# Altium PCB esp32.PcbDoc
Units mm, origin at the board's own origin, x right, y up, seen from the top; angles counter-clockwise.
Board outline 47.1 x 68.1 mm, 2 copper layers (Top Layer, Bottom Layer); 30 components, 48 nets, 113 pads, 14 vias.
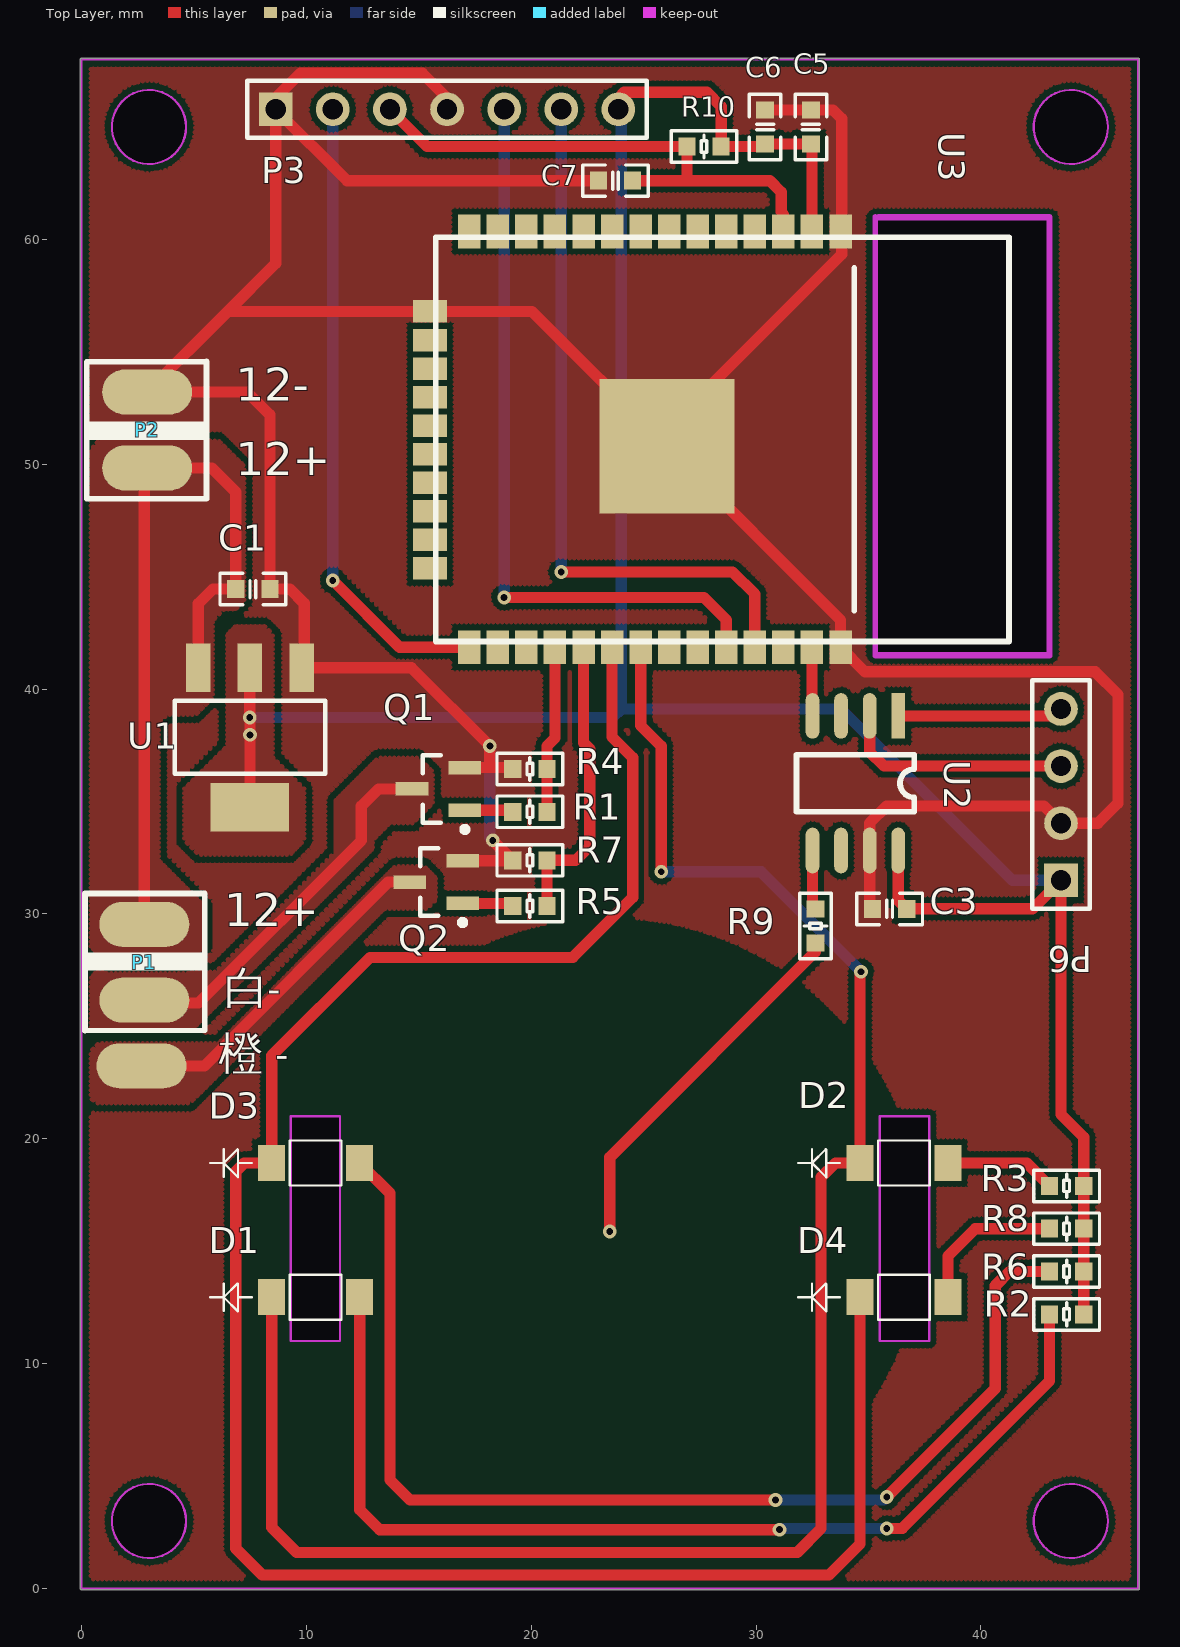
[diagram p0: Top Layer view]
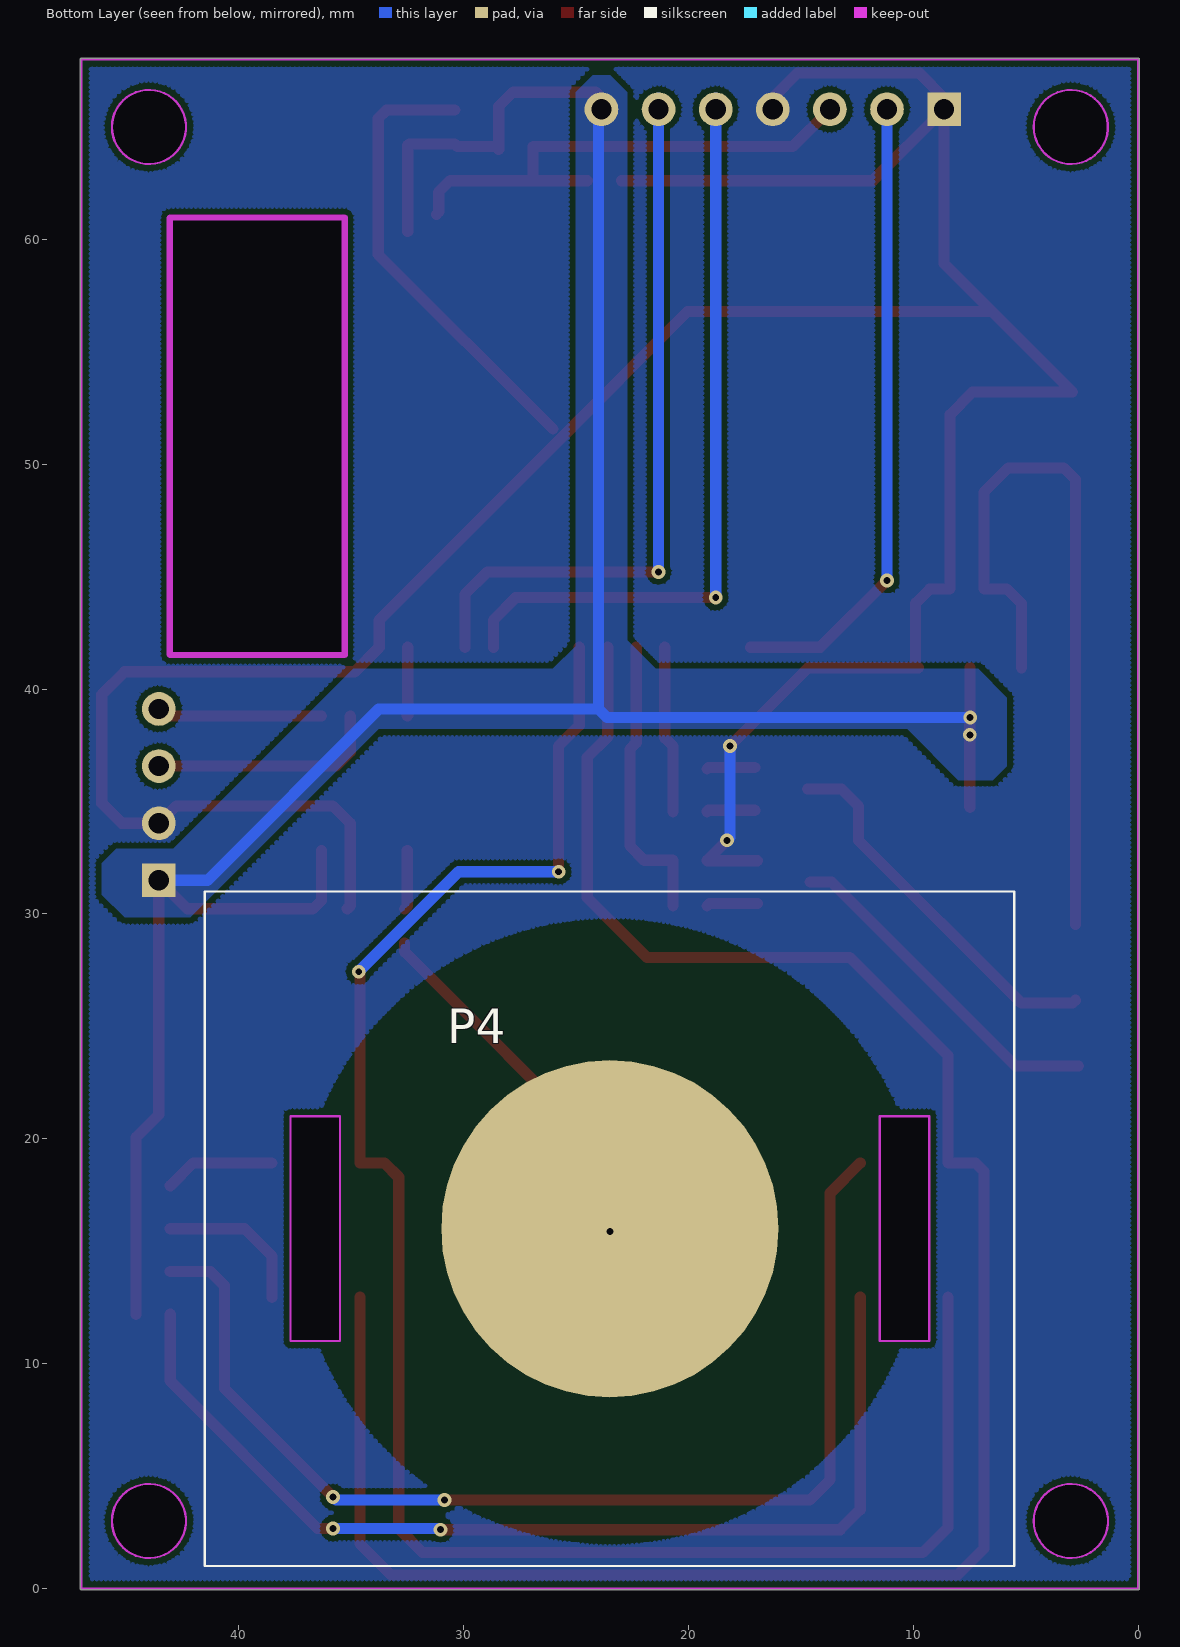
[diagram p1: Bottom Layer view, seen from below]

## Layer stack, top to bottom
Top Solder: solder mask 0.0102, Solder Resist, Dk 3.5
Top Layer: signal copper 0.0356
Dielectric 1: dielectric 0.32, FR-4, Dk 4.8
Bottom Layer: signal copper 0.0356
Bottom Solder: solder mask 0.0102, Solder Resist, Dk 3.5

## Board outline
-0.05,31.5 -0.05,62.5 cw(c0,62.5) -0.05,62.501 -0.05,62.5 ccw(c0,62.5) -0.05,62.499 -0.05,62.5 -0.05,68 cw(c0,68) 0,68.05 cw(c0,68) 0,68.05 47,68.05 cw(c47,68) 47.05,68 47.05,0 cw(c47,0) 47,-0.05 0,-0.05 cw(c0,0) -0.05,0 -0.05,68 ccw(c0,68)
cut-out: 35.179,41.529 ccw(c35.306,41.529) 35.306,41.402 43.053,41.402 ccw(c43.053,41.529) 43.18,41.529 43.18,60.96 ccw(c43.053,60.96) 43.053,61.087 35.433,61.087 ccw(c35.433,60.96) 35.369,61.07 ccw(c35.306,60.96) 35.179,60.96
cut-out: 3,63.35 cw(c3,65) 1.35,65 cw(c3,65) 3,66.65 cw(c3,65) 4.65,65 cw(c3,65)
cut-out: 42.35,65 ccw(c44,65) 44,63.35 ccw(c44,65) 45.65,65 ccw(c44,65) 44,66.65 ccw(c44,65)
cut-out: 1.349,3 ccw(c2.999,3) 2.999,1.35 ccw(c2.999,3) 4.649,3 ccw(c2.999,3) 2.999,4.65 ccw(c2.999,3)
cut-out: 42.35,3 ccw(c44,3) 44,1.35 ccw(c44,3) 45.65,3 ccw(c44,3) 44,4.65 ccw(c44,3)
cut-out: 9.3,11.002 9.3,21.002 11.5,21.002 11.5,11.002
cut-out: 35.5,11.002 35.5,21.002 37.7,21.002 37.7,11.002

## Design rules (kind name [scope] priority, off if disabled: settings)
Clearance [All] p1: gap=0.254 ignorepadtopadclearanceinfootprint=TRUE except(0: SMDPad-Hole THPad-Hole Via-Hole Fill-Hole Poly-Hole Region-Hole Text-Hole)
PolygonConnect [All] p1: connectstyle=Direct reliefconductorwidth=0.254 reliefentries=4 polygonreliefangle="90 Angle" airgapwidth=0.254
RoutingVias [All] p1: holewidth=0.711 width=1.27 viastyle="Through Hole" minholewidth=0.711 minwidth=1.27 maxholewidth=0.711 maxwidth=1.27
ShortCircuit [All] p1: allowed=TRUE
SolderMaskExpansion [All] p1: expansion=0.102
Width [All] p1: maxlimit=1 minlimit=0.5 preferedwidth=0.5
29 further rules are at their usual default settings.

## Components (designator, comment, footprint, x,y, rotation, side; value= is the part's Value field where it differs from the comment)
C1 "1uF/0603/16v/10%" C0603 7.62,44.45 r180 top
C3 "100nF" C0603 35.941,30.226 r0 top
C5 "10uF" C0603 32.436,65.001 r270 top
C6 "0.1uF" C0603 30.404,64.999 r90 top
C7 "0.1uF" C0603 23.749,62.611 r0 top
D1 "Blue" 1206反贴LED 10.414,12.954 r180 top
D2 "Blue" 1206反贴LED 36.576,18.923 r180 top
D3 "white" 1206反贴LED 10.414,18.923 r180 top
D4 "white" 1206反贴LED 36.576,12.954 r180 top
P1 "NC" PAD_2 2.692,29.54 r0 top
P2 "NC" PAD_2 3.023,49.835 r180 top
P3 "Header 7" HDR1X7 8.636,65.786 r0 top
P4 "NC" TOUCH_PAD 23.5,16 r180 bottom
P6 "Header 4" HDR1X4 43.561,31.496 r90 top
Q1 "AO3400/SOT-23" SOT_23_N-MOS 15.875,35.56 r90 top
Q2 "AO3400/SOT-23" SOT_23_N-MOS 15.773,31.42 r90 top
R1 "Resistor 1K/0603/5%" R0603 19.939,34.544 r0 top
R2 "Resistor 680R/0603/5%" R0603 43.815,12.192 r180 top value=1K
R3 "Resistor 680R/0603/5%" R0603 43.815,17.907 r180 top value=1K
R4 "Resistor 4.7K/0603/5%" R0603 19.939,36.449 r0 top
R5 "Resistor 1K/0603/5%" R0603 19.939,30.353 r0 top
R6 "Resistor 680R/0603/5%" R0603 43.815,14.097 r180 top value=1K
R7 "Resistor 4.7K/0603/5%" R0603 19.939,32.385 r0 top
R8 "Resistor 680R/0603/5%" R0603 43.815,16.002 r180 top value=1K
R9 "Resistor 1K/0603/5%" R0603 32.639,29.464 r90 top
R10 "10K" R0603 27.686,64.135 r0 top
U1 "AMS1117-3.3" SOT-223_L6.5-W3.5-P2.30-LS7.0-BR 7.493,37.846 r90 top
U2 "bs83b04" "SOP8 - duplicate - duplicate" 34.417,35.814 r270 top
U3 "ESP-WROOM-32" ESP-WROOM-32 24.625,51.105 r270 top locked
"橙 -" "PAD" PAD 2.667,23.241 r0 top (schematic designator P5)

## Footprints (in the part's own frame and the unit in brackets; to place one, negate y for a bottom-side part, rotate by r counter-clockwise, add the part's x,y. Pads: shape width x height; smd on the part's side, far side on the other; paste and mask are expansions set on the pad)
1206反贴LED [mm]
  rect 1.2x1.6 smd: A(-1.956,0) K(1.956,0)
  silkscreen extent -1.15,-1 4.7,1
C0603 [mm]
  rect 0.76x0.8 smd: 1(-0.76,0) 2(0.76,0)
  silkscreen extent -1.46,-0.7 1.46,0.7
ESP-WROOM-32 [mil]
  rect 59.1x39.4 smd: 1(-364,359.5) 2(-364,309.5) 3(-364,259.5) 4(-364,209.5) 5(-364,159.5) 6(-364,109.5) 7(-364,59.5) 8(-364,9.5) 9(-364,-40.5) 10(-364,-90.5) 11(-364,-140.5) 12(-364,-190.5) 13(-364,-240.5) 14(-364,-290.5) 25(364,-290.5) 26(364,-240.5) 27(364,-190.5) 28(364,-140.5) 29(364,-90.5) 30(364,-40.5) 31(364,9.5) 32(364,59.5) 33(364,109.5) 34(364,159.5) 35(364,209.5) 36(364,259.5) 37(364,309.5) 38(364,359.5)
  rect 39.4x59.1 smd: 15(-224,-359.5) 16(-174,-359.5) 17(-124,-359.5) 18(-74,-359.5) 19(-24,-359.5) 20(26,-359.5) 21(76,-359.5) 22(126,-359.5) 23(176,-359.5) 24(226,-359.5)
  rect 236.2x236.2 smd: 39(12,55.5)
  silkscreen extent -354,-350 354,655
HDR1X4 [mm] "Connector; Header; 4 Position"
  rect 1.5x1.5 hole 0.9: 1(0,0)
  round 1.5 hole 0.9: 2(2.54,0) 3(5.08,0) 4(7.62,0)
  silkscreen extent -1.27,-1.27 8.89,1.27
HDR1X7 [mm] "Connector; Header; 7 Position"
  rect 1.5x1.5 hole 0.9: 1(0,0)
  round 1.5 hole 0.9: 2(2.54,0) 3(5.08,0) 4(7.62,0) 5(10.16,0) 6(12.7,0) 7(15.24,0)
  silkscreen extent -1.27,-1.27 16.51,1.27
PAD [mm]
  oval 4x2 smd: 1(0,0)
PAD_2 [mm]
  oval 4x2 smd: 1(0.102,0) 2(0.102,-3.378)
  silkscreen extent -2.59,-4.74 2.79,1.37
R0603 [mm]
  rect 0.76x0.8 smd: 1(-0.76,0) 2(0.76,0)
  silkscreen extent -1.46,-0.7 1.46,0.7
"SOP8 - duplicate - duplicate" [mil]
  rect 80x24 smd: 1(-117.87,75)
  oval 80x24 smd: 2(-117.87,25) 3(-117.87,-25) 4(-117.87,-75) 5(117.87,-75) 6(117.87,-25) 7(117.87,25) 8(117.87,75)
  silkscreen extent -50,-103 50,103, body extent -118,-96 118,96, height 67
SOT-223_L6.5-W3.5-P2.30-LS7.0-BR [mil]
  rect 85x43 smd: 1(122,-90.5) 2(122,0.5) 3(122,90.5)
  rect 85x138 smd: 4(-122,0.5)
  silkscreen extent -64,-132 64,132
SOT_23_N-MOS [mm]
  rect 0.6x1.45 smd: 1(0,1.175) 2(-0.95,-1.175) 3(0.95,-1.175)
  silkscreen extent -1.92,-1.3 1.5,0.7, body extent -1.5,-0.7 1.5,0.7, height 1.1
TOUCH_PAD [mm]
  round 15 smd: 1(0,0)
  round 15 on Bottom Solder: ""(0,0)

## Part data
C1 C5 C6 C7: library part C0603
C3: library part C0603, "100nF/0603/16v/10%"
D1 D2 D3 D4: library part LED
P1 P2: library part Light
P3: "Header, 7-Pin", LatestRevisionDate=17-Jul-2002, LatestRevisionNote="Re-released for DXP Platform.", Publisher="Altium Limited"
P4: library part TOUCH_PAD
P6: "Header, 4-Pin", LatestRevisionDate=17-Jul-2002, LatestRevisionNote="Re-released for DXP Platform.", Publisher="Altium Limited"
Q1 Q2: library part MOSFET-N, LatestRevisionDate=17-Jul-2002, LatestRevisionNote="Re-released for DXP Platform.", PackageDescription="TO, Flat Index; 3 In-Line, Axial Leads; Body Dia. 4.6mm; Lead Dia. 0.5 mm (max)", PackageReference=E3, PackageVersion=1995/1996, Published=8-Jun-2000, Publisher="Altium Limited"
R1 R4 R5 R7 R9 R10: library part RES
R2 R3 R6 R8: library part Res2, "Resistor 2.2K/0603/5%", LatestRevisionDate=17-Jul-2002, LatestRevisionNote="Re-released for DXP Platform.", PackageDescription="Axial Device, Thru-Hole; 2 Leads; 0.4 in Pin Spacing", PackageReference=AXIAL-0.4, Published=8-Jun-2000, Publisher="Altium Limited"
U1: BOM_LCSC Assembly=Yes, BOM_Manufacturer=SK, BOM_Manufacturer Part=AMS1117-3.3, BOM_Supplier=LCSC, BOM_Supplier Part=C165482, Contributor=LCSC, SMT Type=Extend, spicePre=U, spiceSymbolName=AMS1117-3.3_C165482
U2: library part ASC0130C
U3: BOM_Manufacturer=ESPRESSIF, BOM_Manufacturer Part=ESP-WROOM-32, BOM_Supplier=LCSC, BOM_Supplier Part=C95209, spicePre=U, spiceSymbolName=ESP-WROOM-32

## Via types
v1: diameter 0.61, hole 0.305, Top Layer to Bottom Layer, tented both sides, 14 vias

## Nets (pads, with @x,y where several pads share a name; then routed paths per layer and width w, separated by ;. In a path a pad name is that pad's centre, name@x,y a point inside that pad or via, vN(x,y) a via of type N, cw(c..) or ccw(c..) an arc to the next point about the centre after c; other vN are vias at no path point)
12V: C1.2 P1.1 P2.1 U1.3 | length 33.6
  Top Layer w0.5: P1.1 2.794,49.327 3.302,49.835 5.791,49.835 6.858,48.768 6.858,44.45 5.842,44.45 5.194,43.802 U1.3
CLK: U3.20
CMD: U3.19
GND: C1.1 C3.1 C5.1 C6.2 C7.1 P2.2 P3.1 P3.4 P6.2 Q1.3 Q2.3 R4.1 R7.1 U1.1 U2.7 U3.1 U3.15 U3.38 U3.39 | length 167.4
  Top Layer w0.5: P3.4@16.256,66.294 15.15,67.4 9.742,67.4 8.636,66.294 P3.1 ; Q2.3 19.164,32.37 R7.1 19.177,32.385 v1(18.288,33.274) ; Q1.3 18.161,36.51 ; R4.1 19.118,36.51 18.161,36.51 ; C7.1 11.811,62.611 P3.1 ; U3.39@26.035,51.562 33.807,59.334 33.807,65.38 33.426,65.761 C5.1 32.434,65.759 C6.2 ; C3.1 35.052,30.355 U2.7 35.052,34.036 35.814,34.798 42.799,34.798 P6.2 45.212,34.036 46.101,34.925 46.101,39.751 45.085,40.767 34.849,40.767 U3.38 33.757,43.078 U3.39 20.041,56.794 U3.15 6.502,56.794 ; 6.502,56.794 8.636,58.928 P3.1 ; 6.502,56.794 P2.2 7.366,53.213 8.38,52.199 C1.1 9.271,44.45 9.906,43.815 9.906,41.059 U1.1 14.681,40.945 v1(18.161,37.465) 18.161,36.51
  Bottom Layer w0.5: v1(18.161,37.465) 18.161,33.401 v1(18.288,33.274)
IO0: P3.2 U3.25 | length 28.3
  Top Layer w0.5: v1(11.176,44.831) 14.148,41.859 U3.25
  Bottom Layer w0.5: v1(11.176,44.831) P3.2
IO2: U3.24
IO4: U3.26
IO5: R5.2 R7.2 U3.29 | length 13.2
  Top Layer w0.5: R5.2 R7.2 21.971,32.385 22.606,33.02 22.606,37.338 22.327,37.617 U3.29
IO12: U3.14
IO13: U3.16
IO14: U3.13
IO15: U3.23
IO16: U3.27
IO17: R1.2 R4.2 U3.28 | length 7.5
  Top Layer w0.5: R1.2 R4.2 20.699,37.467 21.057,37.825 U3.28
IO18: D3.K D4.K U3.30 | length 93.6
  Top Layer w0.5: U3.30 23.597,37.871 24.511,36.957 24.511,30.734 21.844,28.067 12.827,28.067 8.458,23.698 D3.K 7.239,18.923 6.858,18.542 6.858,1.778 8.036,0.6 33.239,0.6 34.62,1.981 D4.K
IO19: D1.K D2.K U3.31 | length 82.8
  Top Layer w0.5: D1.K 8.458,2.718 9.572,1.604 31.83,1.604 32.893,2.667 32.893,18.288 33.528,18.923 D2.K 34.62,27.381 v1(34.671,27.432) ; U3.31 24.867,38.379 25.781,37.465 v1(25.781,31.877)
  Bottom Layer w0.5: v1(25.781,31.877) 30.226,31.877 v1(34.671,27.432)
IO21: U3.33
IO22: U3.36
IO23: U2.4 U3.37 | length 3.1
  Top Layer w0.5: U3.37 32.487,38.833 U2.4
IO25: U3.10
IO26: U3.11
IO27: U3.12
IO32: U3.8
IO33: U3.9
IO34: U3.6
IO35: U3.7
NE: C7.2 P3.3 R10.1 U3.3 | length 23.3
  Top Layer w0.5: P3.3 15.367,64.135 R10.1 26.926,62.736 27.051,62.611 ; C7.2 27.051,62.611 ; 31.217,61.112 31.115,61.214 31.115,62.103 30.607,62.611 27.051,62.611
NetD1_A: D1.A R2.2 | length 46.2
  Top Layer w0.5: D1.A 12.37,3.505 13.259,2.616 v1(31.039,2.616) ; v1(35.814,2.667) 36.499,2.667 43.055,9.223 R2.2
  Bottom Layer w0.5: v1(31.039,2.616) 31.09,2.667 v1(35.814,2.667)
NetD2_A: D2.A R3.2 | length 4.9
  Top Layer w0.5: D2.A 42.039,18.923 R3.2
NetD3_A: D3.A R6.2 | length 51.2
  Top Layer w0.5: D3.A 13.716,17.577 13.716,4.826 14.605,3.937 v1(30.861,3.937) ; v1(35.814,4.064) 40.64,8.89 40.64,13.462 41.275,14.097 R6.2
  Bottom Layer w0.5: v1(30.861,3.937) 35.687,3.937 v1(35.814,4.064)
NetD4_A: D4.A R8.2 | length 6.9
  Top Layer w0.5: D4.A 38.532,14.783 39.751,16.002 R8.2
NetP1_2: P1.2 Q1.1 | length 16.8
  Top Layer w0.5: P1.2 2.921,26.035 5.207,26.035 12.446,33.274 12.446,34.798 13.208,35.56 Q1.1
NetP4_1: P4.1 R9.1 | length 16.6
  Top Layer w0.5: v1(23.495,15.875) 23.495,19.177 32.639,28.321 R9.1
NetP5_1: "橙 -.1" Q2.1 | length 15.3
  Top Layer w0.5: 2.667,23.241 5.461,23.241 13.64,31.42 Q2.1
NetQ1_2: Q1.2 R1.1 | length 2.2
  Top Layer w0.5: Q1.2 19.113,34.61 R1.1
NetQ2_2: Q2.2 R5.1 | length 2.3
  Top Layer w0.5: Q2.2 19.062,30.47 R5.1
NetR9_2: R9.2 U2.5 | length 2.6
  Top Layer w0.5: U2.5 32.512,30.351 R9.2
RXD0: P3.5 U3.34 | length 33.7
  Top Layer w0.5: v1(18.796,44.069) 27.686,44.069 28.677,43.078 U3.34
  Bottom Layer w0.5: v1(18.796,44.069) P3.5 P3.5@18.796,66.294
SCK: P6.3 U2.2 | length 10.4
  Top Layer w0.5: U2.2 35.052,37.211 35.687,36.576 P6.3
SD0: U3.21
SD1: U3.22
SD2: U3.17
SD3: U3.18
SDK: P6.4 U2.1 | length 7.4
  Top Layer w0.5: U2.1 43.253,38.808 P6.4
SENSOR_VN: U3.5
SENSOR_VP: U3.4
TXD0: P3.6 U3.35 | length 32.5
  Top Layer w0.5: v1(21.336,45.212) 28.956,45.212 29.947,44.221 U3.35
  Bottom Layer w0.5: v1(21.336,45.212) P3.6 P3.6@21.336,66.294
VCC: C3.2 C5.2 C6.1 P3.7 P6.1 R2.1 R3.1 R6.1 R8.1 R10.2 U1.2 U1.4 U2.8 U3.2 | length 116.9
  Top Layer w0.5: U1.4 7.493,34.76 v1(7.493,37.963) 7.493,38.722 v1(7.48,38.735) U1.2 ; P3.7@23.876,66.294 24.13,66.548 27.813,66.548 28.448,65.913 R10.2@28.448,64.135 ; R10.2 R10.2@28.448,64.135 ; R10.2@28.453,64.01 28.448,64.01 R10.2@28.448,64.135 ; U3.2 32.487,64.19 C5.2 30.406,64.241 C6.1 30.3,64.135 R10.2@28.448,64.135 ; U2.8 36.322,30.605 C3.2 42.291,30.226 P6.1 43.561,21.082 44.577,20.066 44.577,12.194 R2.1
  Bottom Layer w0.5: v1(7.48,38.735) 23.622,38.735 24.003,39.116 ; P3.7@24.003,65.786 24.003,39.116 ; P6.1 41.402,31.496 33.782,39.116 24.003,39.116
pads on no net: P4. U2.3 U2.6 U3.32

## Polygon pours and split planes (outlines as drawn)
GND on Bottom Layer "NONET_L-01_P-001" (hatched 90Degree grid 0.2 track 0.2, remove dead copper, pour order 12): 0.14,67.938 46.876,67.938 47.14,67.674 47.14,-0.062 0.14,-0.062
VCC on Bottom Layer "NONET_L-01_P-001" (solid, remove dead copper, pour order 0): 6.477,35.941 8.001,35.941 10.287,38.227 33.782,38.227 42.164,29.845 45.085,29.845 46.101,30.861 46.101,32.258 45.466,32.893 42.926,32.893 34.925,40.894 26.035,40.894 25.019,41.91 25.019,66.548 24.257,67.31 23.495,67.31 22.733,66.548 22.733,42.164 21.463,40.894 7.112,40.894 5.842,39.624 5.842,36.576
GND on Top Layer "NONET_L-01_P-001" (hatched 90Degree grid 0.2 track 0.2, remove dead copper, pour order 10): 0.104,67.883 47.104,67.883 47.104,0.147 46.84,-0.117 0.104,-0.117
NetP5_1 on Top Layer "NONET_L-01_P-001" (hatched 90Degree grid 0.2 track 0.2, remove dead copper, pour order 8): 0.762,24.257 6.096,24.257 13.97,32.131 15.24,32.131 15.748,31.623 15.748,30.607 15.367,30.226 13.462,30.226 4.826,21.59 0.635,21.59 0,22.225 0,23.495
NetP1_2 on Top Layer "NONET_L-01_P-001" (hatched 90Degree grid 0.2 track 0.2, remove dead copper, pour order 6): 0.635,27.432 5.969,27.432 11.303,32.766 11.303,35.052 13.208,36.957 14.986,36.957 15.621,36.322 15.621,34.925 14.732,34.036 13.716,34.036 12.954,33.274 12.954,32.893 4.953,24.892 0.381,24.892 0,25.273 0,26.543
12V on Top Layer "NONET_L-01_P-001" (hatched 90Degree grid 0.2 track 0.2, remove dead copper, pour order 4): 0.762,51.054 6.096,51.054 7.239,49.911 7.239,43.942 6.858,43.561 6.35,43.561 5.842,43.053 5.842,39.624 5.08,38.862 3.81,38.862 3.429,38.481 3.429,32.385 5.461,30.353 5.461,28.575 4.699,27.813 1.143,27.813 0,28.956 0,50.165
VCC on Top Layer "NONET_L-01_P-001" (hatched 90Degree grid 0.2 track 0.2, remove dead copper, pour order 2): 6.858,42.799 8.128,42.799 8.509,42.418 8.509,36.957 9.906,35.56 9.906,33.274 9.271,32.639 5.207,32.639 4.572,33.274 4.572,35.56 6.477,37.465 6.477,42.418

## Keep-outs
Keep-Out Layer:
  circle w0.1: c2.999,3 r1.65
  circle w0.1: c3,65 r1.65
  circle w0.1: c44,65 r1.65
  circle w0.1: c44,3 r1.65
  lines w0.1: 0,0.5 0,31.5 0,62.5 0,67.5 0,68 ; 0.5,0 46.5,0 ; 0.5,68 46.5,68 ; 47,0.5 47,62.5 47,67.5 ; 0,68 0,0 47,0 47,68 0,68 ; 9.3,11.002 9.3,16.002 9.3,21.002 11.5,21.002 11.5,16.002 11.5,11.002 9.3,11.002 ; 35.5,11.002 35.5,16.002 35.5,21.002 37.7,21.002 37.7,16.002 37.7,11.002 35.5,11.002
  lines w0.254: 35.306,60.96 35.306,41.529 43.053,41.529 43.053,60.96 35.433,60.96

## Other copper
Top Layer:
  pour cut-out: 9.3,11.002 9.3,21.002 11.5,21.002 11.5,11.002
Multi-Layer:
  pour cut-out: 9.508,15.875 ccw(c23.495,15.875) 23.495,1.888 ccw(c23.495,15.875) 37.482,15.875 ccw(c23.495,15.875) 23.495,29.862 ccw(c23.495,15.875)

## Silkscreen, mask and mechanical layers (free items; w line width, h text height)
Top Overlay:
  text "12-" at 6.858,52.324 h2.5
  text "12+" at 6.858,49.022 h2.5
  text "12+" at 6.35,28.956 h2.5
  text "白-" at 6.35,25.527 h2.5
Bottom Overlay:
  lines w0.1: 5.52,12.442 5.52,13.91 ; 5.52,18.094 5.52,19.558 ; 41.52,12.442 41.52,13.91 ; 41.52,18.094 41.52,19.558 ; 5.52,1 5.52,31 41.52,31 41.52,1 5.52,1